# Allegro board M249V10_200212.brd
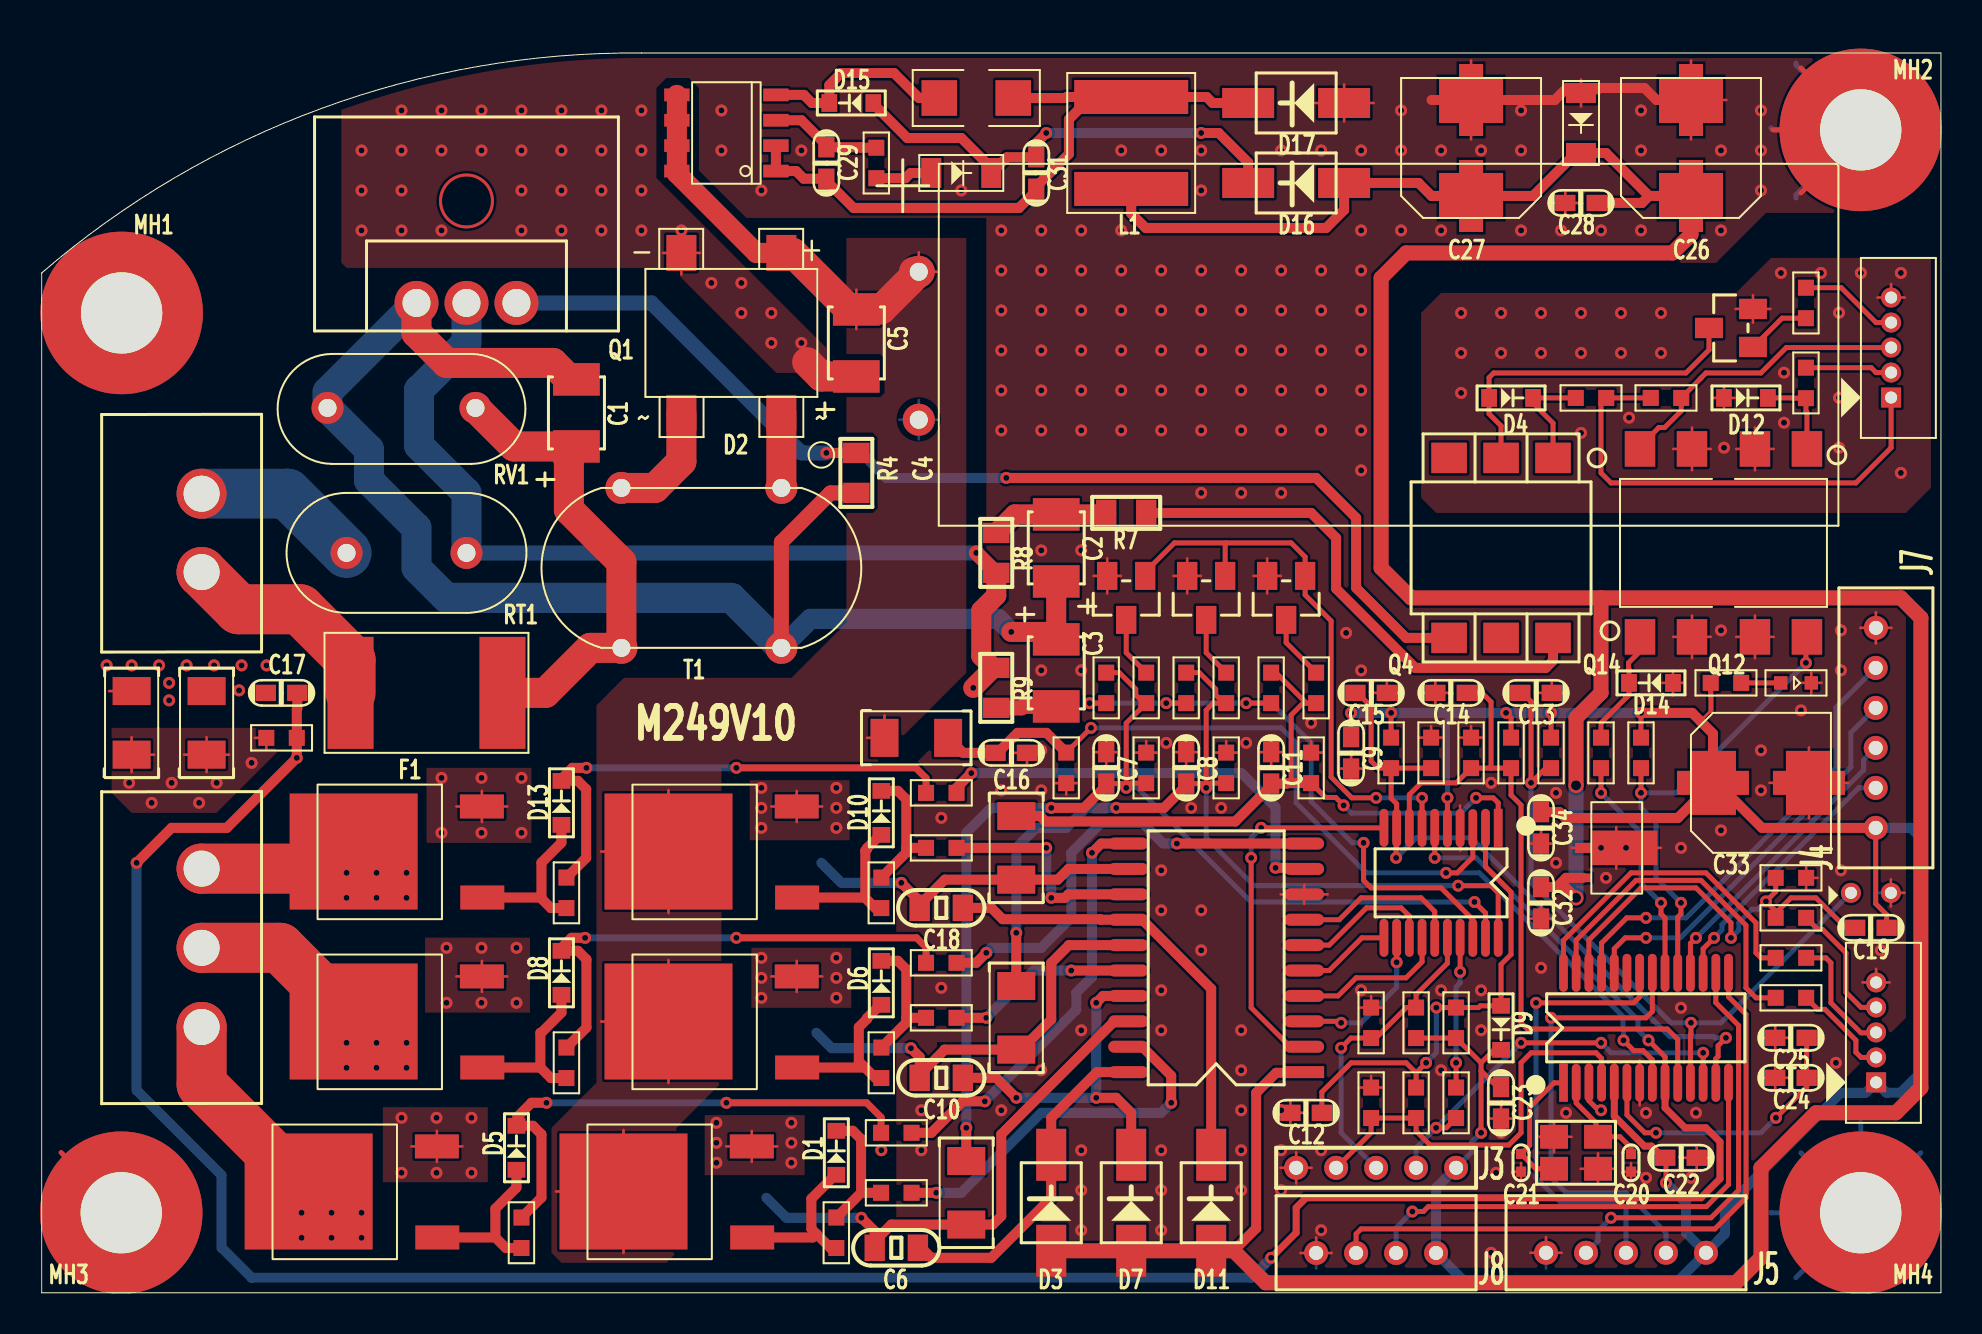
[diagram p0: board, top side]
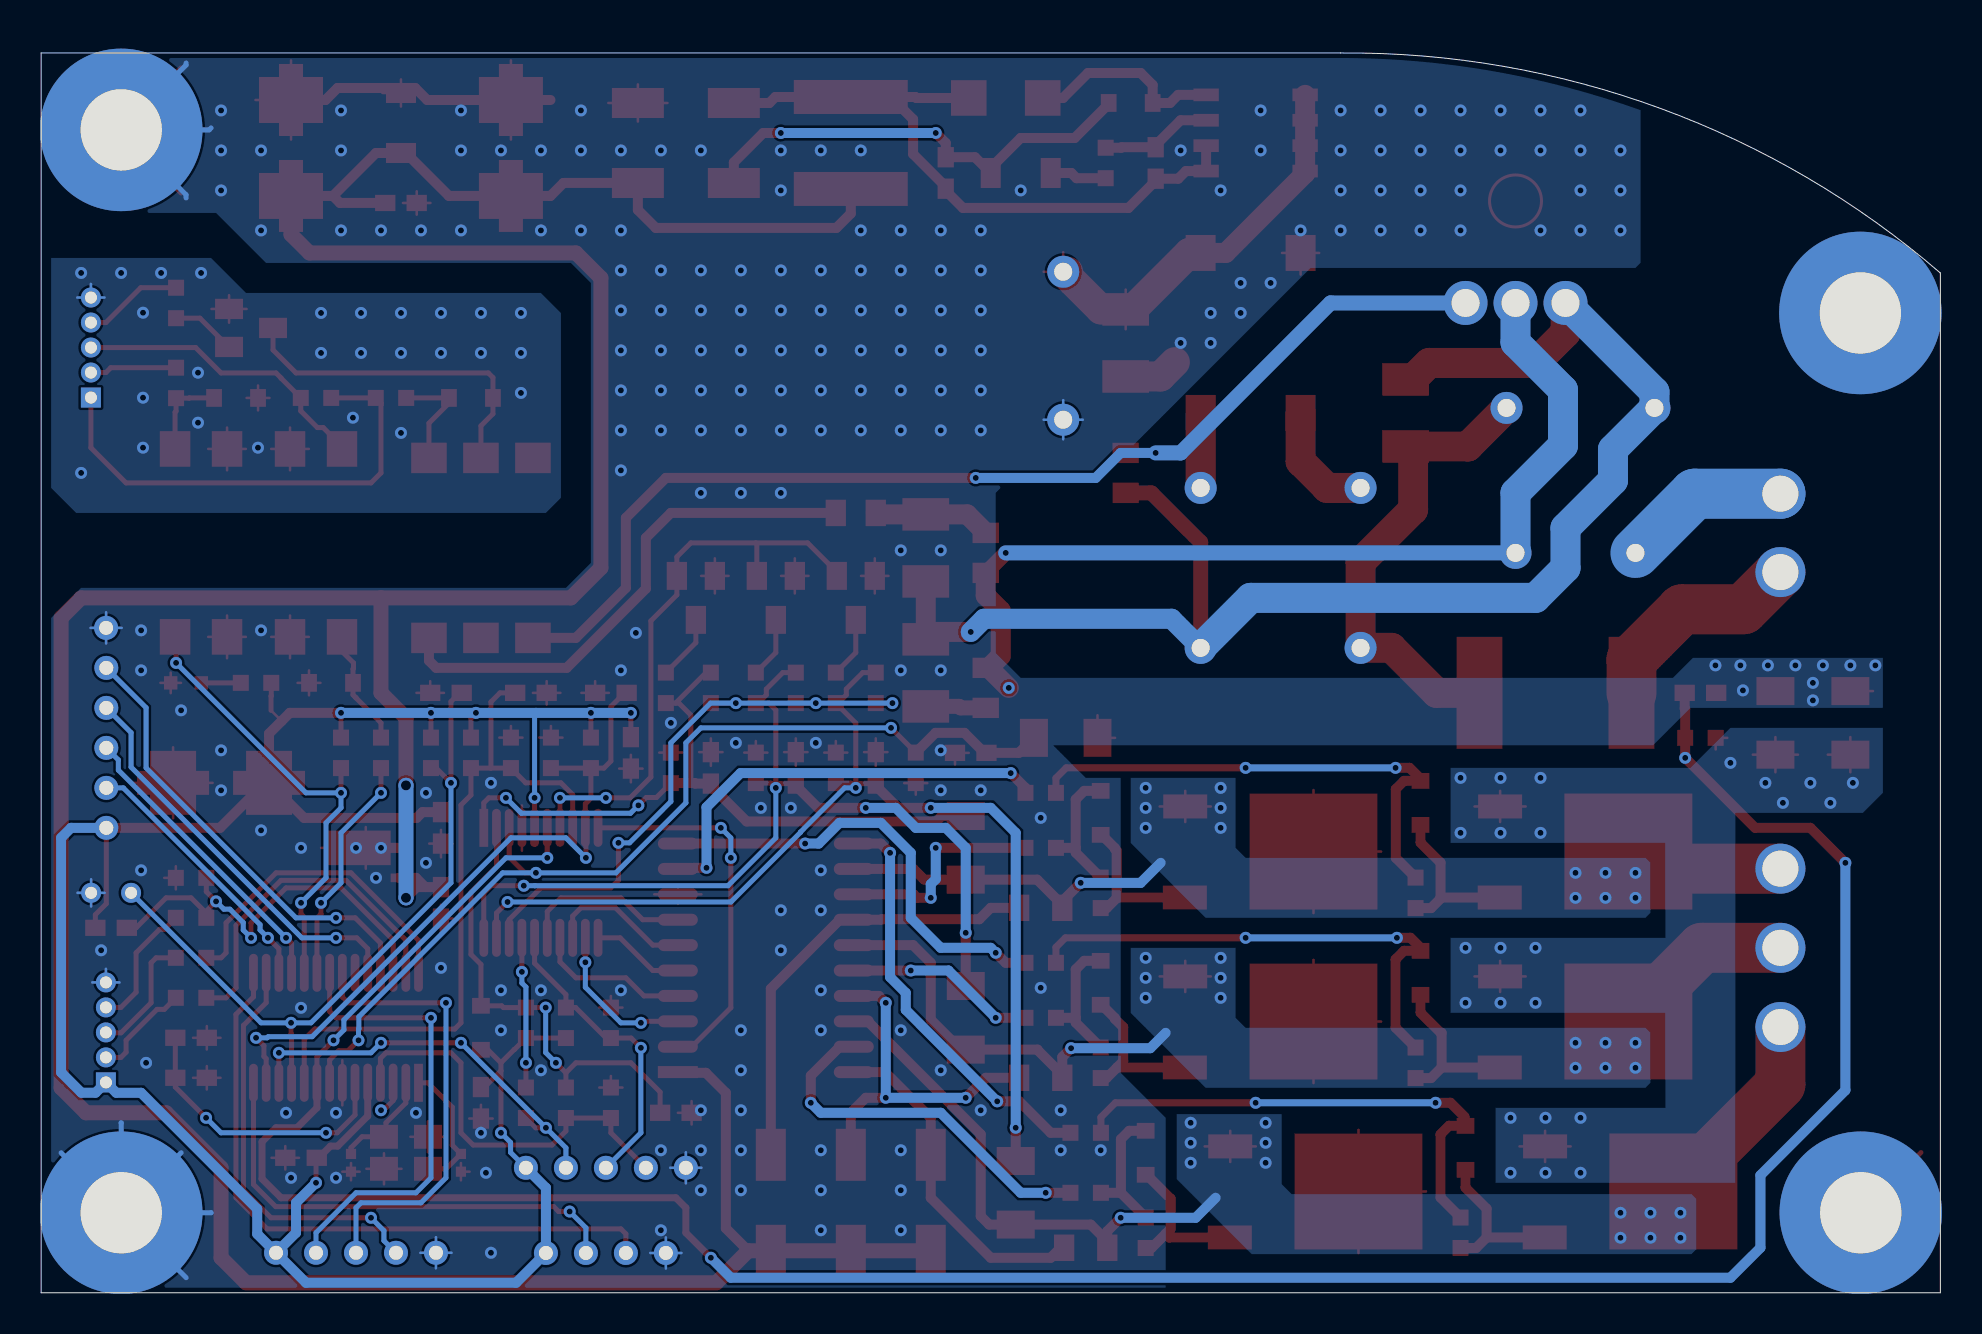
[diagram p1: board, bottom side, seen from below]

Outline 95 x 62 mm; copper layers: TOP, BOTTOM. Coordinates in mm from the lower left corner of the outline.
Outline path: 0,51 arc(14,59.23) 30,62 95,62 95,0 0,0 0,51

## Design rules (mm)
constraint set DEFAULT: min track width 0.127

## Placement (name value [footprint] x y rotation side)
C1  104/500V  [C1210]  26.75 44 90 top
C2  NI-503/400V  [C1210]  50.75 37.25 90 top
C3  103/500V  [C1210]  50.75 31 270 top
C4  100uF/450V  [CAP_18X37]  43.87 47.36 270 top
C5  104/500V  [C1210]  40.75 47.5 90 top
C6  106  [C0805]  42.75 2.25 180 top
C7  474  [C0603]  53.25 26.25 270 top
C8  474  [C0603]  57.25 26.25 270 top
C9  224  [C0603]  65.5 27 90 top
C10  106  [C0805]  45 10.75 180 top
C11  474  [C0603]  61.5 26.25 270 top
C12  105  [C0603]  63.25 9 0 top
C13  474  [C0603]  74.75 30 180 top
C14  474  [C0603]  70.5 30 0 top
C15  224  [C0603]  66.5 30 180 top
C16  474  [C0603]  48.5 27 180 top
C17  474  [C0603]  12 30 0 top
C18  106  [C0805]  45 19.25 180 top
C19  475  [C0603]  91.5 18.25 0 top
C20  NI-10pF  [C0402]  79.5 6.5 90 top
C21  NI-10pF  [C0402]  74 6.5 90 top
C22  106  [C0603]  82 6.75 180 top
C23  104  [C0603]  73 9.5 90 top
C24  475  [C0603]  87.5 10.75 0 top
C25  104  [C0603]  87.5 12.75 0 top
C26  220uF/16V  [C6_3X7_7AV]  82.5 57.25 180 top
C27  220uF/16V  [C6_3X7_7AV]  71.5 57.25 180 top
C28  224  [C0603]  77 54.5 0 top
C29  223  [C0603]  39.25 56.5 90 top
C30  10uF/50V  [C1206]  46.75 59.75 180 top
C31  474  [C0603]  49.75 56 270 top
C32  224  [C0603]  75 19.5 90 top
C33  220uF/16V  [C6_3X7_7AV]  86 25.5 90 top
C34  224  [C0603]  75 23.25 90 top
D1  1N4148WS  [SOD-323]  39.75 7 270 top
D2  -  [DB307S]  34.5 48 180 top
D3  RS1M  [DO-214AC]  50.5 4.5 270 top
D4  1N4148WS  [SOD-323]  73.5 44.75 180 top
D5  1N4148WS  [SOD-323]  23.75 7.25 270 top
D6  1N4148WS  [SOD-323]  42 15.5 270 top
D7  RS1M  [DO-214AC]  54.5 4.5 270 top
D8  1N4148WS  [SOD-323]  26 16 270 top
D9  1N4148WS  [SOD-323]  73 13.25 90 top
D10  1N4148WS  [SOD-323]  42 24 270 top
D11  RS1M  [DO-214AC]  58.5 4.5 270 top
D12  1N4148WS  [SOD-323]  85.25 44.75 180 top
D13  1N4148WS  [SOD-323]  26 24.5 270 top
D14  1N4148WS  [SOD-323]  80.5 30.5 0 top
D15  1N4148WS  [SOD-323]  40.5 59.5 0 top
D16  RS1M  [DO-214AC]  62.75 55.5 0 top
D17  RS1M  [DO-214AC]  62.75 59.5 0 top
F1  JK-SMD075L  [JK-SMD2920]  19.25 30 180 top
J1  WAFER 3.96 2P  [CV-W3961-02]  8 38 90 top
J2  WAFER 3.96 3P  [CV-W3961-03]  8 17.25 90 top
J3  CON5  [PIN-W20-05]  66.75 6.25 180 top
J4  B2S  [PIN-W20-02]  91.5 20 0 top
J5  WAFER 2.0 5P  [CP-W20-05]  79.25 2 0 top
J6  WAFER 1.25 5P  [CCX-W125-05]  92.5 47.25 180 top
J7  WAFER 2.0 6P  [CP-W20-06]  91.75 28.25 270 top
J8  WAFER 2.0 4P  [CP-W20-04]  66.75 2 0 top
J9  WAFER 1.25 5P  [CCX-W125-05]  91.75 13 180 top
L1  1mH  [NR6040]  54.5 57.5 270 top
LED1  RED  [LED0603]  87.75 30.5 0 top
MH1  -  [4MMP8]  4 49 0 top
MH2  -  [4MMP8]  90.99 58.16 0 top
MH3  -  [4MMP8]  3.98 4 0 top
MH4  -  [4MMP8]  90.99 4 0 top
Q1  BTB10-600BW  [TO220HS]  21.25 49.5 0 top
Q2  JY8N5M  [TO252]  35.25 2.75 90 top
Q3  MMBT3904  [SOT-23]  84.5 48.25 90 top
Q4  MOC3042SM  [SOP-6X]  73 37.25 180 top
Q5  JY8N5M  [TO252]  19.5 2.75 90 top
Q6  AO3400  [SOT-23]  54.25 34.75 180 top
Q7  AO3400  [SOT-23]  58.25 34.75 180 top
Q8  JY8N5M  [TO252]  37.5 11.25 90 top
Q9  AO3400  [SOT-23]  62.25 34.75 180 top
Q10  JY8N5M  [TO252]  21.75 11.25 90 top
Q11  JY8N5M  [TO252]  37.5 19.75 90 top
Q12  EL817S1-C  [SOP-4Y]  87 37.5 270 top
Q13  JY8N5M  [TO252]  21.75 19.75 90 top
Q14  EL817S1-C  [SOP-4Y]  81.25 37.5 90 top
R1  5.1R  [R0603]  42.75 5 180 top
R2  100  [R0603]  77.5 44.75 180 top
R3  1K  [R0603]  84.25 30.5 180 top
R4  330  [R0805]  40.75 41 90 top
R5  1K  [R0603]  88.25 49.5 270 top
R6  51R  [R0603]  39.75 3 270 top
R7  360  [R0805]  54.25 39 180 top
R8  0R  [R0805]  47.75 37 270 top
R9  39  [R0805]  47.75 30.25 270 top
R10  5.1R  [R0603]  42.75 8 180 top
R11  560  [R0603]  55.25 30.25 270 top
R12  10K  [R0603]  53.25 30.25 90 top
R13  300K  [R1206]  46.25 5 270 top
R14  51R  [R0603]  24 3 270 top
R15  100K  [R0603]  55.25 26.25 270 top
R16  560  [R0603]  59.25 30.25 270 top
R17  10K  [R0603]  57.25 30.25 90 top
R18  300K  [R1206]  48.75 13.75 270 top
R19  100K  [R0603]  59.25 26.25 270 top
R20  5.1R  [R0603]  45 13.75 180 top
R21  560  [R0603]  63.75 30.25 270 top
R22  51R  [R0603]  42 11.5 270 top
R23  10K  [R0603]  61.5 30.25 90 top
R24  300K  [R1206]  48.75 22.25 270 top
R25  100K  [R0603]  63.5 26.25 270 top
R26  5.1R  [R0603]  45 16.5 180 top
R27  10K  [R0603]  68.75 13.5 270 top
R28  10K  [R0603]  70.75 13.5 270 top
R29  51R  [R0603]  26.25 11.5 270 top
R30  1K  [R0603]  70.75 9.5 270 top
R31  0R  [R0603]  68.75 9.5 270 top
R32  10K  [R0603]  75.5 27 90 top
R33  10K  [R0603]  73.5 27 90 top
R34  10K  [R0603]  67.5 27 90 top
R35  NI-1M  [R1206]  43.75 27.75 180 top
R36  NI-0  [R0603]  66.5 13.5 270 top
R37  NI-1M  [R0603]  66.5 9.5 270 top
R38  10K  [R0603]  12 27.75 180 top
R39  100R  [R0603]  69.5 27 270 top
R40  10K  [R0603]  51.25 26.25 90 top
R41  R005  [R1206]  8.25 28.5 270 top
R42  R005  [R1206]  4.5 28.5 270 top
R43  5.1R  [R0603]  45 22.25 180 top
R44  5.1K  [R0603]  80 27 90 top
R45  51R  [R0603]  42 20 270 top
R46  10K_1%  [R0603]  88.25 45.5 270 top
R47  5.1K  [R0603]  81.25 44.75 180 top
R48  5.1R  [R0603]  45 25 180 top
R49  51R  [R0603]  26.25 20 270 top
R50  NI-47K  [R0603]  87.5 20.75 180 top
R51  10K_1%  [R0603]  78 27 270 top
R52  4.7K  [R0603]  87.5 14.75 0 top
R53  4.7K  [R0603]  87.5 16.75 0 top
R54  4.7K  [R0603]  87.5 18.75 0 top
R55  1K  [R0603]  41.75 56.5 270 top
RT1  MF72-010D11  [MF72D11]  18.25 37 180 top
RT2  10K3950K  [R0603]  71.5 27 90 top
RV1  10D471K  [MOV-10D]  18 44.25 0 top
T1  100uH  [14X9X5_0R8MM]  33 36.25 180 top
U1  JY213H  [SOP20-W300]  58.75 16.75 180 top
U2  JY02A  [SSOP20-W150]  70 20.5 270 top
U3  MPC82FG5B32  [SSOP28-W150]  80.25 13.25 90 top
U4  VIPER12A  [SOIC8]  34.25 58 180 top
U5  78L05  [SOT-89]  78.75 22.25 0 top
Y1  NI-24MHz/10ppm  [XTAL3225]  76.75 7 180 top
ZD1  ZMM18  [SOD-80]  77 58.5 90 top
ZD2  ZMM12  [SOD-80]  46 56 180 top

## Library data of the parts
C1-C3 C5-C19 C22-C25 C28-C32 C34 = CAPACITOR
C4 C26 C27 C33 = CAPACITOR POL
C20 C21 = CAPACITOR_0
D1 D4-D6 D8-D10 D12-D15 = DIODE_SCHTKY_0
D2 = DB107
D3 D7 D11 D16 D17 = LED_0
F1 = FUSE
J1 = CONN PWR 2-H
J2 = HEADER 3
J3 = CONN RECT 5
J4 = B2S_0
J5 J6 J9 = CONN RCPT 5
J7 = CONN RCPT 6
J8 = CONN RCPT 4
L1 = INDUCTOR FERRITE
LED1 = LED
MH1-MH4 = MTH9_0
Q1 = TRIAC_3
Q2 Q5 Q8 Q10 Q11 Q13 = MOS-N_0
Q3 = 2N3904_16
Q4 = TRIAC DRIVER_7
Q6 = MOS-N_6
Q7 = MOS-N_7
Q9 = MOS-N_8
Q12 Q14 = TLP632_0
R1-R55 = R
RT1 RT2 = NTC_2
RV1 = VARISTOR
T1 = CHOKE CM14_0
U1 = NE555_1
U2 = NE555_3
U3 = NE555_8
U4 = RT7266_1: Tolerance: ***; User Part Number: ***
U5 = AMS1117-AOI_1
Y1 = XTAL_4PIN_S
ZD1 ZD2 = ZDIODE_0

## Footprints (pads in the part's own frame, mm; a bottom-side part is the same pattern mirrored in y, then rotated)
4MMP8
  round 8.128 hole 4.064: 1(0,0)
14X9X5_0R8MM
  round 1.6 hole 0.9: 1(-4,4) 2(4,4) 3(4,-4) 4(-4,-4)
C6_3X7_7AV
  custom 3.2x3.6 smd: 1(0,2.4) 2(0,-2.4)
C0402
  rect 0.508x0.508 smd: 1(-0.445,0) 2(0.445,0)
C0603
  rect 1.016x0.813 smd: 1(-0.787,0) 2(0.787,0)
C0805
  rect 1.016x1.321 smd: 1(-1.079,0) 2(1.079,0)
C1206
  rect 1.78x1.78 smd: 1(-1.85,0) 2(1.85,0)
C1210
  rect 1.626x2.337 smd: 1(-1.676,0) 2(1.676,0)
CAP_18X37
  round 1.6 hole 0.9: 1(-3.7,0) 2(3.7,0)
CCX-W125-05
  rect 1x1 hole 0.6: 1(-0.01,2.48)
  round 1 hole 0.6: 2(-0.01,1.23) 3(-0.01,-0.02) 4(-0.01,-1.27) 5(-0.01,-2.52)
CP-W20-04
  round 1.2 hole 0.7: 1(3,-0.01) 2(1,-0.01) 3(-1,-0.01) 4(-3,-0.01)
CP-W20-05
  round 1.2 hole 0.7: 1(4,0) 2(2,0) 3(0,0) 4(-2,0) 5(-4,0)
CP-W20-06
  round 1.2 hole 0.7: 1(5,-0.01) 2(3,-0.01) 3(1,-0.01) 4(-1,-0.01) 5(-3,-0.01) 6(-5,0)
CV-W3961-02
  round 2.5 hole 1.8: 1(-1.96,0) 2(1.96,0)
CV-W3961-03
  round 2.5 hole 1.8: 1(-3.96,0) 2(0,0) 3(3.96,0)
DB307S
  rect 1.5x1.8 smd: 1(-2.5,4) 2(-2.5,-4) 3(2.5,4) 4(2.5,-4)
DO-214AC
  rect 2.6x1.5 smd: 1(2.4,0) 2(-2.4,0)
JK-SMD2920
  rect 2.3x5.6 smd: 1(-3.8,0) 2(3.8,0)
LED0603
  rect 0.671x0.671 smd: 1(-0.762,0) 2(0.768,0)
MF72D11
  round 1.6 hole 0.9: 1(-3,0) 2(3,0)
MOV-10D
  round 1.6 hole 0.9: 1(-3.7,0) 2(3.7,0)
NR6040
  rect 1.7x5.7 smd: 1(-2.3,0) 2(2.3,0)
PIN-W20-02
  round 1 hole 0.6: 1(-1,0) 2(1,0)
PIN-W20-05
  round 1.2 hole 0.7: 1(-4,0) 2(-2,0) 3(0,0) 4(2,0) 5(4,0)
R0603
  rect 0.8x0.8 smd: 1(-0.762,0) 2(0.762,0)
R0805
  rect 1.016x1.321 smd: 1(-1,0) 2(1,0)
R1206
  rect 1.4x1.9 smd: 1(-1.59,0) 2(1.59,0)
SOD-80
  rect 1x1.5 smd: 1(1.5,0) 2(-1.5,0)
SOD-323
  rect 0.787x0.889 smd: 1(1.1,0) 2(-1.1,0)
SOIC8
  rect 1.27x0.635 smd: 1(-2.477,1.905) 2(-2.477,0.635) 3(-2.477,-0.635) 4(-2.477,-1.905) 5(2.477,-1.905) 6(2.477,-0.635) 7(2.477,0.635) 8(2.477,1.905)
SOP20-W300
  rect 2x0.6 smd: 1(-4.4,5.715)
  oval 2x0.6 smd: 2(-4.4,4.445) 3(-4.4,3.175) 4(-4.4,1.905) 5(-4.4,0.635) 6(-4.4,-0.635) 7(-4.4,-1.905) 8(-4.4,-3.175) 9(-4.4,-4.445) 10(-4.4,-5.715) 11(4.4,-5.715) 12(4.4,-4.445) 13(4.4,-3.175) 14(4.4,-1.905) 15(4.4,-0.635) 16(4.4,0.635) 17(4.4,1.905) 18(4.4,3.175) 19(4.4,4.445) 20(4.4,5.715)
SOP-4Y
  rect 1.78x1.525 smd: 1(-4.7,1.3) 2(-4.7,-1.3) 3(4.7,-1.3) 4(4.7,1.3)
SOP-6X
  rect 1.78x1.525 smd: 1(-2.6,-4.5) 2(0,-4.5) 3(2.6,-4.5) 4(2.6,4.5) 5(0,4.5) 6(-2.6,4.5)
SOT-23
  rect 1.016x1.397 smd: 1(-0.95,-1.1) 2(0.95,-1.1) 3(0,1.1)
SOT-89
  rect 0.813x0.432 smd: 1(-1.64,1.497) 3(-1.64,-1.5)
  custom 4.115x1.727 smd: 2(0.011,-0.001)
SSOP20-W150
  rect 1.9x0.44 smd: 1(-2.75,2.857)
  oval 1.9x0.44 smd: 2(-2.75,2.223) 3(-2.74,1.587) 4(-2.74,0.953) 5(-2.74,0.318) 6(-2.75,-0.318) 7(-2.75,-0.953) 8(-2.75,-1.587) 9(-2.75,-2.223) 10(-2.75,-2.857) 11(2.75,-2.857) 12(2.75,-2.223) 13(2.75,-1.587) 14(2.75,-0.953) 15(2.75,-0.318) 16(2.75,0.318) 17(2.75,0.953) 18(2.75,1.587) 19(2.75,2.223) 20(2.75,2.857)
SSOP28-W150
  rect 1.9x0.44 smd: 1(-2.75,4.126)
  oval 1.9x0.44 smd: 2(-2.75,3.491) 3(-2.74,2.856) 4(-2.74,2.221) 5(-2.74,1.586) 6(-2.75,0.951) 7(-2.75,0.316) 8(-2.75,-0.319) 9(-2.75,-0.954) 10(-2.75,-1.589) 11(-2.75,-2.223) 12(-2.75,-2.857) 13(-2.75,-3.493) 14(-2.75,-4.128) 15(2.75,-4.128) 16(2.75,-3.493) 17(2.75,-2.857) 18(2.75,-2.223) 19(2.75,-1.587) 20(2.75,-0.953) 21(2.75,-0.318) 22(2.75,0.318) 23(2.75,0.953) 24(2.75,1.587) 25(2.75,2.223) 26(2.75,2.857) 27(2.75,3.493) 28(2.75,4.128)
TO220HS
  round 2.2 hole 1.4: 1(2.5,0) 2(0,0) 3(-2.5,0)
TO252
  rect 1.2x2.2 smd: 1(0.015,-0.29) 3(4.57,-0.27)
  rect 5.8x6.4 smd: 2(2.315,6.145)
XTAL3225
  rect 1.397x1.194 smd: 1(-1.1,-0.8) 2(1.1,-0.8) 3(1.1,0.8) 4(-1.1,0.8)

## Nets
GND: C4.2 C5.1 C7.1 C8.1 C9.1 C11.1 C12.1 C13.1 C14.1 C15.1 C16.1 C17.1 C20.1 C21.1 C22.1 C23.1 C24.1 C25.1 C26.2 C27.2 C28.1 C32.1 C33.2 C34.1 D2.4 D14.1 D17.1 J3.5 J4.2 J5.5 J7.6 J8.4 J9.5 LED1.2(CATHODE) MH1.1(NC) MH2.1(NC) MH3.1(NC) MH4.1(NC) Q6.2(SOURCE) Q7.2(SOURCE) Q9.2(SOURCE) Q12.3(EMITTER) Q14.2 R15.1 R19.1 R25.1 R36.1 R37.1 R39.1 R40.1 R41.1 R42.1 R50.1 RT2.2 U1.8 U2.4 U3.7 U5.2(VSS) Y1.2 Y1.4 ZD1.1
GND_SIGNAL: D12.1 J6.5 Q3.2(EMITTER) Q12.2 Q14.3(EMITTER)
VCC-IO: J6.1 R2.1 R47.2
AT: C14.2 R33.1 RT2.1 U2.8 U3.10
CT: C13.2 J4.1 R32.1 U3.11
DC5V: C9.2 C19.2 C22.2 C23.2 C33.1 C34.2 D9.2(C) J3.1 J5.1 J7.1 J8.1 J9.1 R3.2 R27.2 R28.2 R32.2 R33.2 R34.2 R44.2 U2.5 U3.5(VSS) U5.1
DC12V: C26.1 C27.1 C28.2 C32.2 D3.1 D7.1 D11.1 D16.1 L1.2 U1.1 U5.3 ZD1.2(CATHODE)
DC310V: C4.1 C5.2 D2.2(DC OUT PLUS) Q2.2 Q8.2 Q11.2 R35.2 U4.5 U4.6 U4.7 U4.8
DS-PWM: U3.3
DS-RXD: J5.3 U3.22
DS-SLP: J5.4 U3.16
DS-TXD: J5.2 U3.21
EMF: R12.1 R17.1 R23.1 U2.18
EMF-ON: Q6.1 Q7.1 Q9.1 U2.7
EMFA: C7.2 R11.2 R12.2 R13.1 R15.2 U2.19
EMFB: C8.2 R16.2 R17.2 R18.1 R19.2 U2.20
EMFC: C11.2 R21.2 R23.2 R24.1 R25.2 U2.1
IOUT: Q5.3(SOURCE) Q10.3(SOURCE) Q13.3(SOURCE) R38.2 R41.2 R42.2
IS: C17.2 R38.1 U2.6 U3.9
MO: R30.1 U2.17
MP: J3.2 R30.2 U3.12
MPC-RX: Q12.4 R44.1 U3.19
MPC-TX: R51.2 U3.20
OCDSCL: R52.1 U3.27
OCDSDA: R53.1 U3.28
OSW1: J7.2 U3.17
OSW2: J7.3 U3.18
P3_5: U3.23
PIR1: J7.4 U3.24
PIR2: J7.5 U3.25
PRS1: J8.2 U3.14
PRS2: J8.3 U3.15
PWR-ON: J6.4 R5.1
QD: C15.2 R34.1 R39.2 U2.9 U3.13
RST: C19.1 R50.2 R54.1 U3.26
SYS-RX: J6.3 Q14.4 R47.1
SYS-TX: J6.2 R46.1
U: C6.2 J2.1 Q2.3(SOURCE) Q5.2 R13.2 U1.18
UH: U1.2 U2.10
UHO: R1.1 U1.19
UL: U1.5 U2.11
ULO: R10.1 U1.11
UVB: C6.1 D3.2(CATHODE) U1.20
V+: C10.2 J2.2 Q8.3(SOURCE) Q10.2 R18.2 U1.15
VH: U1.3 U2.12
VHO: R20.1 U1.16
VL: U1.6 U2.13
VLO: R26.1 U1.10
VOD: C16.2 R35.1 R40.2 U2.3 U3.8
VR: C12.2 D9.1 R28.1 R31.1 U2.2
VRI: J3.4 R31.2 R37.2 U3.4
VVB: C10.1 D7.2(CATHODE) U1.17
W: C18.2 J2.3 Q11.3(SOURCE) Q13.2 R24.2 U1.12(VSW)
WH: U1.4 U2.14
WHO: R43.1 U1.13
WL: U1.7 U2.15
WLO: R48.1 U1.9
WVB: C18.1 D11.2(CATHODE) U1.14
XTAL1: C21.2 U3.1 Y1.3
XTAL2: C20.2 U3.2 Y1.1
ZF: J3.3 R27.1 R36.2 U2.16(Z/F)
N4601745: C1.2 C2.1 C3.1 Q1.3 R4.1 RV1.1 T1.1
N4601755: C1.1 F1.1 RV1.2 T1.2
N4602027: D2.3 T1.3
N16738380: D1.2(C) R1.2 R6.1
N16738503: D5.2(C) R10.2 R14.1
N16738511: D5.1 Q5.1 R14.2
N16741777: D1.1 Q2.1 R6.2
N16742623: D6.2(C) R20.2 R22.1
N16742635: D6.1 Q8.1 R22.2
N16742849: D8.2(C) R26.2 R29.1
N16742861: D8.1 Q10.1 R29.2
N16743057: D10.2(C) R43.2 R45.1
N16743069: D10.1 Q11.1 R45.2
N16743283: D13.2(C) R48.2 R49.1
N16743295: D13.1 Q13.1 R49.2
N16774211: Q7.3 R16.1
N16774244: Q6.3 R11.1
N16774481: Q9.3 R21.1
N16819977: D2.1 T1.4
N16878550: C24.2 C25.2 U3.6
N16891021: J9.2 R52.2
N16891035: J9.3 R53.2
N16891049: J9.4 R54.2
N16892886: D14.2(C) Q14.1 R51.1
N16893309: D12.2(C) Q12.1 R46.2
N16971591: LED1.1 R3.1
N16977302: J1.2 RT1.2
N16977308: F1.2 J1.1
N16980594: D4.2(C) Q4.1 R2.2
N16984452: Q4.6 R7.1
N16984463: Q1.2 R8.2 R9.1 RT1.1
N16984545: D4.1 Q3.3 Q4.2
N16986923: Q1.1(GATE) Q4.4 R4.2
N16989663: Q3.1 R5.2
N16989795: C3.2 R9.2
N16991969: C2.2 R7.2 R8.1
N16997004: C30.2 D15.2(C) U4.4(VDD)
N16997008: C31.1 D15.1 D16.2(CATHODE) ZD2.2(CATHODE)
N16997012: C29.1 C30.1 C31.2 D17.2(CATHODE) L1.1 U4.1 U4.2
N16997119: R55.2 ZD2.1
N16997188: C29.2 R55.1 U4.3

Pads without a net: Q4 3 5

## Via types
v1: diameter 0.6, hole 0.3, TOP to BOTTOM, 395 vias
v2: diameter 0.75, hole 0.5, TOP to BOTTOM, 2 vias

## Routing (per net, layer and track width the routed paths; a pad name or vN(x,y) marks a point on that pad's centre or on a via; arc(x,y) is an arc through that point)
GND: length 235.8
  TOP w0.127: R36.1 66.5,14.84 ; R36.1 67.08,14.26 ; R36.1 65.92,14.26 ; 74.42,22.46 C34.1 ; C34.1 75,23.15 ; C34.1 75,21.78 ; C34.1 75.58,22.46 ; J8.4 64.53,1.99 ; J8.4 62.97,1.99 ; J8.4 63.75,2.77 ; C32.1 75,19.4 ; C32.1 75,18.03 ; C32.1 75.58,18.71 ; C32.1 74.42,18.71 ; J5.5 75.25,2.78 ; J5.5 74.47,2 ; J5.5 76.03,2 ; C26.2 82.5,61.63 ; C26.2 84.28,59.65 ; C26.2 82.5,57.67 ; 77,59.32 ZD1.1 ; ZD1.1 77.93,60 ; ZD1.1 76.07,60 ; ZD1.1 77,60.68 ; 53.25,26.35 C7.1 ; C7.1 53.83,27.04 ; C7.1 53.25,27.72 ; C7.1 52.67,27.04 ; 32,50.92 D2.4 ; D2.4 32.93,52 ; D2.4 31.07,52 ; D2.4 32,53.08 ; 63.15,19.45 U1.8 ; U1.8 64.33,19.93 ; U1.8 63.15,20.4 ; U1.8 61.97,19.93 ; 53.3,34.97 Q6.2 ; Q6.2 53.3,36.73 ; Q6.2 53.99,35.85 ; Q6.2 52.61,35.85 ; 51.25,24.91 R40.1 ; R40.1 51.83,25.49 ; R40.1 50.67,25.49 ; C23.1 73,9.4 ; C23.1 73,8.03 ; C23.1 72.42,8.71 ; C23.1 73.58,8.71 ; 91.75,32.47 J7.6 ; J7.6 90.97,33.25 ; J7.6 92.53,33.25 ; J7.6 91.75,34.03 ; 62.46,8.42 C12.1 ; C12.1 63.15,9 ; C12.1 62.46,9.58 ; 74.77,7.8 Y1.2 ; Y1.2 75.65,8.57 ; Y1.2 76.53,7.8 ; Y1.2 75.65,7.03 ; R50.1 88.84,20.75 ; R50.1 88.26,20.17 ; R50.1 88.26,21.33 ; J3.5 62.75,7.03 ; J3.5 62.75,5.47 ; J3.5 63.53,6.25 ; J3.5 61.97,6.25 ; C8.1 57.83,27.04 ; C8.1 56.67,27.04 ; C8.1 57.25,27.72 ; C8.1 57.25,26.35 ; Q7.2 57.99,35.85 ; Q7.2 56.61,35.85 ; Q7.2 57.3,36.73 ; Q7.2 57.3,34.97 ; C13.1 76.22,30 ; C13.1 75.54,30.58 ; C13.1 74.85,30 ; J4.2 93.18,20 ; J4.2 92.5,20.68 ; J4.2 92.5,19.32 ; 84.76,32.8 Q12.3 ; Q12.3 85.7,33.87 ; Q12.3 86.64,32.8 ; Q12.3 85.7,31.73 ; C22.1 83.47,6.75 ; C22.1 82.79,7.33 ; C22.1 82.79,6.17 ; C22.1 82.1,6.75 ; C28.1 76.9,54.5 ; C28.1 76.21,55.08 ; C28.1 75.53,54.5 ; C28.1 76.21,53.92 ; LED1.2 88.52,31.01 ; LED1.2 88,30.5 ; LED1.2 88.52,29.99 ; LED1.2 89.03,30.5 ; 63.67,59.5 D17.1 ; D17.1 65.15,58.57 ; D17.1 65.15,60.43 ; D17.1 66.63,59.5 ; 62.92,27.01 R25.1 ; R25.1 64.08,27.01 ; R25.1 63.5,27.59 ; RT2.2 72.08,27.76 ; RT2.2 71.5,28.34 ; RT2.2 70.92,27.76 ; 60.92,27.04 C11.1 ; C11.1 62.08,27.04 ; C11.1 61.5,26.35 ; C11.1 61.5,27.72 ; R37.1 66.5,10.84 ; R37.1 65.92,10.26 ; R37.1 67.08,10.26 ; 74,5.62 C21.1 ; C21.1 73.57,6.06 ; C21.1 74,6.49 ; 58.67,27.01 R19.1 ; R19.1 59.83,27.01 ; R19.1 59.25,27.59 ; 61.3,34.97 Q9.2 ; Q9.2 61.99,35.85 ; Q9.2 60.61,35.85 ; Q9.2 61.3,36.73 ; 86.03,12.75 C25.1 ; C25.1 86.71,12.17 ; C25.1 87.4,12.75 ; C25.1 86.71,13.33 ; 49.29,26.42 C16.1 ; C16.1 49.97,27 ; C16.1 48.6,27 ; C14.1 70.4,30 ; C14.1 69.03,30 ; C14.1 69.71,29.42 ; C14.1 69.71,30.58 ; 86.03,10.75 C24.1 ; C24.1 86.71,11.33 ; C24.1 86.71,10.17 ; C24.1 87.4,10.75 ; 79.07,6.06 C20.1 ; C20.1 79.93,6.06 ; C20.1 79.5,6.49 ; C20.1 79.5,5.62 ; 81.6,29.88 D14.1 ; D14.1 81.03,30.5 ; D14.1 82.17,30.5 ; D14.1 81.6,31.12 ; 79.93,9.37 U3.7 79.93,11.63 ; R39.1 70.08,27.76 ; R39.1 68.92,27.76 ; R39.1 69.5,28.34 ; Y1.4 77.85,6.97 ; Y1.4 76.97,6.2 ; Y1.4 77.85,5.43 ; Y1.4 78.73,6.2 ; C15.1 67.29,30.58 ; C15.1 67.97,30 ; C15.1 66.6,30 ; C9.1 65.5,26.9 ; C9.1 66.08,26.21 ; C9.1 64.92,26.21 ; C9.1 65.5,25.53 ; R42.1 3.37,30.09 ; Q14.2 82.55,33.87 ; Q14.2 81.61,32.8 ; Q14.2 83.49,32.8 ; Q14.2 82.55,31.73 ; 71.5,61.63 C27.2 71.5,57.67 ; C33.2 90.38,25.5 ; C33.2 88.4,27.28 ; C33.2 86.42,25.5 ; C33.2 88.4,23.72 ; 76.53,22.25 U5.2 ; U5.2 78.76,23.29 ; U5.2 78.76,21.21 ; U5.2 81,22.25 ; 70.95,24.37 U2.4 70.95,22.11 ; R15.1 55.83,27.01 ; R15.1 54.67,27.01 ; R15.1 55.25,27.59 ; J9.5 91.76,16.2 ; J9.5 92.44,15.52 ; J9.5 91.08,15.52
  TOP w0.25: 88,61.25 90.99,58.26 MH2.1 ; MH2.1 86.59,58.16 ; MH2.1 90.99,57.99 88,55 ; MH3.1 0.97,7.01
  TOP w0.5: C26.2 80.77,59.65 80.17,60.25 76.29,60.25 75.69,59.65 C27.2 69.52,59.65
  TOP w1.5: C5.1 39.01,45.82 38.29,46.54
  BOTTOM w0.127: 75.25,1.22 J5.5 ; J5.5 74.47,2 ; J5.5 76.03,2 ; J5.5 75.25,2.78 ; C4.2 44.85,43.66 ; C4.2 43.87,42.68 ; C4.2 42.9,43.66 ; C4.2 43.87,44.64 ; J9.5 92.44,15.52 ; J9.5 91.76,16.2 ; J9.5 91.08,15.52 ; 90.97,33.25 J7.6 ; J7.6 92.53,33.25 ; J7.6 91.75,32.47 ; J7.6 91.75,34.03 ; 62.75,5.47 J3.5 ; J3.5 62.75,7.03 ; J3.5 61.97,6.25 ; J3.5 63.53,6.25 ; 62.97,1.99 J8.4 ; J8.4 63.75,2.77 ; J8.4 63.75,1.21 ; J8.4 64.53,1.99 ; J4.2 93.18,20 ; J4.2 92.5,19.32 ; J4.2 92.5,20.68 ; J4.2 91.82,20
  BOTTOM w0.25: 94,7 91,4 MH4.1 ; MH2.1 86.59,58.16 86.5,58.25 ; MH2.1 87.75,61.4 87.75,61.5 ; MH2.1 87.75,54.91 87.75,54.75 ; 90.99,4.01 88,7 ; 90.99,4.01 90.99,8.49 91,8.5 ; 90.99,4.01 MH4.1 ; MH4.1 87.75,0.75 ; MH4.1 86.5,4 86.5,4
  vias: v1(3.25,31.38) v1(4.5,31.38) v1(5.88,31.38) v1(6.38,30.5) v1(6.38,29.62) v1(7.25,31.38) v1(8.62,31.38) v1(9.88,30.12) v1(10,31.38) v1(11.25,31.38) v1(16,57.13) v1(16,55.13) v1(16,53.13) v1(18,59.13) v1(18,57.13) v1(18,55.13) v1(18,53.13) v1(20,59.13) v1(20,57.13) v1(20,53.13) v1(22,59.13) v1(22,57.13) v1(24,59.13) v1(24,57.13) v1(24,55.13) v1(24,53.13) v1(26,59.13) v1(26,57.13) v1(26,55.13) v1(26,53.13) v1(28,59.13) v1(28,57.13) v1(28,55.13) v1(28,53.13) v1(30,59.13) v1(30,57.13) v1(30,55.13) v1(30,53.13) v1(32,53.13) v1(33.5,50.5) v1(34,59.13) v1(34,57.13) v1(35,50.5) v1(35,49) v1(36,55.13) v1(36.5,49) v1(36.5,47.5) v1(38,57.13) v1(38,47.5) v1(42,7.13) v1(44,9.13) v1(44,7.13) v1(45,23.75) v1(45,15.25) v1(46,55.13) v1(48,53.13) v1(48,51.13) v1(48,49.13) v1(48,47.13) v1(48,45.13) v1(48,43.13) v1(48,25.13) v1(48,9.13) v1(50,53.13) v1(50,51.13) v1(50,49.13) v1(50,47.13) v1(50,45.13) v1(50,43.13) v1(50,37.13) v1(50,31.13) v1(50,27.13) v1(50,25.13) v1(50,11.13) v1(52,53.13) v1(52,51.13) v1(52,49.13) v1(52,47.13) v1(52,45.13) v1(52,43.13) v1(52,37.13) v1(52,31.13) v1(52,13.13) v1(52,7.13) v1(52,5.13) v1(52,3.13) v1(54,57.13) v1(54,53.13) v1(54,51.13) v1(54,49.13) v1(54,47.13) v1(54,45.13) v1(54,43.13) v1(56,57.13) v1(56,51.13) v1(56,49.13) v1(56,47.13) v1(56,45.13) v1(56,43.13) v1(56,21.13) v1(56,19.13) v1(56,15.13) v1(56,13.13) v1(56,7.13) v1(56,5.13) v1(56,3.13) v1(56.25,27.5) v1(57.5,24.25) v1(58,57.13) v1(58,55.13) v1(58,51.13) v1(58,49.13) v1(58,47.13) v1(58,45.13) v1(58,43.13) v1(58,40) v1(58,19.13) v1(58,17.13) v1(59,24.25) v1(60,51.13) v1(60,49.13) v1(60,47.13) v1(60,45.13) v1(60,43.13) v1(60,40) v1(60,13.13) v1(60,11.13) v1(60,9.13) v1(60,7.13) v1(60,5.13) v1(60.25,27.5) v1(62,57.13) v1(62,51.13) v1(62,49.13) v1(62,47.13) v1(62,45.13) v1(62,43.13) v1(62,40) v1(62,9.13) v1(62,7.13) v1(62,5.13) v1(63.5,28.5) v1(64,57.13) v1(64,51.13) v1(64,49.13) v1(64,47.13) v1(64,45.13) v1(64,43.13) v1(64,7.13) v1(64,3.13) v1(65.25,33) v1(66,57.13) v1(66,53.13) v1(66,51.13) v1(66,49.13) v1(66,47.13) v1(66,45.13) v1(66,43.13) v1(66,41.13) v1(66,31.13) v1(66,15.13) v1(68,59.13) v1(68,57.13) v1(68,53.13) v1(70,57.13) v1(70,53.13) v1(70,15.13) v1(70,11.13) v1(72,57.13) v1(72,15.13) v1(72,13.13) v1(72.5,25.5) v1(72.5,2) v1(72.75,6) v1(73,8) v1(74,59.13) v1(74,57.13) v1(74,53.13) v1(75,16.25) v1(75.75,25) v1(75.75,21.5) v1(76,53.13) v1(76.25,9) v1(78,53.13) v1(78,22.25) v1(78.25,20.75) v1(79.25,22.25) v1(80,59.13) v1(80,57.13) v1(80,53.13) v1(80.25,9) v1(80.25,5.75) v1(82,22.25) v1(82,14.25) v1(82.5,5.75) v1(82.75,9) v1(84,57.13) v1(84,53.13) v1(84,33.13) v1(84,23.13) v1(86,59.13) v1(86,57.13) v1(86,55.13) v1(86,27.13) v1(86,25.13) v1(88,29.13) v1(89.75,11.5) v1(90,33.13) v1(90,31.13) v1(90,21.13) v1(92,17.13)
GND_SIGNAL: length 17.6
  TOP w0.127: 81.61,42.2 Q14.3 ; Q14.3 82.55,43.27 ; Q14.3 82.55,41.13 ; Q14.3 83.49,42.2 ; 83.58,44.75 D12.1 ; D12.1 84.15,44.13 ; D12.1 84.15,45.37 ; D12.1 84.72,44.75 ; J6.5 93.19,49.77 ; J6.5 92.51,50.45 ; J6.5 91.83,49.77 ; 85.6,48.51 Q3.2 ; Q3.2 85.6,49.89 ; Q3.2 86.48,49.2 ; Q3.2 84.72,49.2 ; 85.7,41.13 Q12.2 ; Q12.2 86.64,42.2 ; Q12.2 84.76,42.2 ; Q12.2 85.7,43.27
  BOTTOM w0.127: 91.83,49.77 J6.5 ; J6.5 93.19,49.77 ; J6.5 92.51,50.45
  vias: v1(71,49) v1(71,47) v1(71,45) v1(73,49) v1(73,47) v1(75,49) v1(75,47) v1(77,49) v1(77,47) v1(77,43) v1(79,49) v1(79,47) v1(79.4,43.76) v1(81,49) v1(81,47) v1(84.15,42.26) v1(87,51) v1(87.15,46.01) v1(87.15,43.51) v1(89,51) v1(89.9,49.01) v1(89.9,44.76) v1(89.9,42.26) v1(91,51) v1(93,51) v1(93,41)
VCC-IO: length 24
  TOP w0.25: R47.2 R2.1 78,44.49 78,41 78.5,40.5 90.75,40.5 92.51,42.26 J6.1
AT: length 35.3
  TOP w0.25: C14.2 72.05,30 72.5,29.55 72.5,26.24 ; 72.5,26.24 R33.1 73.5,24.89 74,24.39 74,13.5 74.31,13.19 81.31,13.19 81.84,12.66 U3.10 ; 72.5,26.24 RT2.1 70.76,25.5 69,25.5 68.41,24.91 U2.8
CT: length 35.7
  TOP w0.25: v1(82.5,13.5) 82.5,12.94 82.47,12.92 U3.11 ; C13.2 74.06,30 74.5,29.56 v1(74.5,25.5) 75.24,26.24 R32.1
  BOTTOM w0.25: v1(74.5,25.5) 74.5,20.5 81.5,13.5 v1(82.5,13.5) 84,13.5 J4.1
DC5V: length 131
  TOP w0.127: 83.5,29.12 82.97,28.59
  TOP w0.25: v1(81.25,5.5) 81.25,6.71 ; 72,11.1 v1(72,8) ; 72,11.1 72.81,10.29 C23.2 ; 72,11.1 72,11.5 ; R3.2 83.49,29.85 83.5,29.84 83.5,29.12 ; R33.2 73.5,28.75 v1(73.25,29) ; v1(70.32,24.75) U2.5 ; R44.2 v1(80,29) ; C19.2 92.29,18.91 91.74,19.46 J7.1 ; R34.2 v1(67.5,29) ; R32.2 v1(75.5,29) ; v1(65.5,29) C9.2 ; D9.2 72.65,12.15 72,11.5 ; 72,11.5 71.34,12.16 71.33,12.16 R28.2 R27.2
  TOP w0.35: C22.2 81.11,6.75 80.53,7.33 80.17,7.33 78.66,8.84 U3.5
  TOP w0.5: C33.1 83.8,25.5 86.05,23.25 J7.1 ; C33.1 83.6,27.96 82.56,29 v1(80,29) ; C33.1 81.85,23.75 U5.1 76.22,23.75 75.93,24.04 C34.2 ; 81.25,6.71 C22.2
  BOTTOM w0.25: 70.25,29 70.32,28.93 v1(70.32,24.75) ; J3.1 71.52,7.02 71.52,7.52 v1(72,8)
  BOTTOM w0.5: v1(80,29) v1(75.5,29) v1(73.25,29) v1(67.5,29) v1(65.5,29) ; v1(81.25,5.5) 82.25,4.5 82.25,3 J5.1 ; J3.1 69.75,5.25 J8.1 71.24,0.5 81.75,0.5 J5.1 ; J7.1 93.5,23.25 94,22.75 94,11.02 92.98,10 92.28,10 J9.1 91.24,10 90,10 84.19,4.19 84.19,2.94 J5.1
DC12V: length 201.5
  TOP w0.5: L1.2 54.5,53.97 55.22,53.25 64.25,53.25 65.15,54.15 D16.1 68.87,55.5 69.52,54.85 C27.1 74.6,54.85 76.75,57 ZD1.2 78.25,57 80.4,54.85 ; U1.1 63.12,11 61.75,11 60.75,10 60.75,3.22 59.63,2.1 ; v2(76.75,19.75) 76.21,20.29 75.79,20.29 ; C32.2 75.79,20.29 ; 75.79,20.29 76.25,20.75 U5.3 ; C28.2 80.05,54.5 80.4,54.85 ; 80.4,54.85 C26.1
  TOP w0.75: D3.1 D7.1 D11.1 59.63,2.1 61.23,0.5 84.75,0.5 86,1.75 86,6.25 88.75,9 92.75,9 94,10.25 94,33.75 93,34.75 78,34.75 ; C26.1 82.5,52.92 81.58,52 68.25,52 67,50.75 67,36.25 68.5,34.75 78,34.75 ; 78,34.75 78,30 76.75,28.75 v2(76.75,25.38)
  BOTTOM w0.75: v2(76.75,25.38) v2(76.75,19.75)
DC310V: length 55.4
  TOP w0.127: 31.36,10.49 Q8.2 ; Q8.2 27.98,13.56 ; Q8.2 31.36,16.64 ; 29.11,1.99 Q2.2 ; Q2.2 29.11,8.14 ; Q2.2 25.73,5.07 ; Q11.2 31.36,25.14 ; Q11.2 31.36,18.99 ; Q11.2 27.98,22.07 ; 41.28,27.75 R35.2 42.16,28.88 ; 40.75,50.17 C5.2 40.75,48.19 ; C4.1 44.85,51.06 ; C4.1 43.87,52.04 ; C4.1 43.87,50.08
  TOP w1: D2.2 35.75,52 31.77,55.98 U4.8 U4.7 U4.6 U4.5
  TOP w1.5: 43.63,51.06 C4.1 41.99,49.18 C5.2 40.39,49.18 37.57,52 D2.2
DS-PWM: length 1.7
  TOP w0.25: U3.3 77.39,9.61 77.75,9.25 77.88,9.25 v1(78,9.13)
DS-RXD: length 22.6
  TOP w0.25: v1(74.75,14.5) 79.63,14.5 79.93,14.8 U3.22
  BOTTOM w0.25: J5.3 79.25,4.25 79,4.5 76,4.5 74.75,5.75 v1(74.75,14.5)
DS-SLP: length 20.6
  TOP w0.25: U3.16 83.74,14.51 84.88,13.37 84.88,5.13 83.5,3.75 v1(78.5,3.75)
  BOTTOM w0.25: v1(78.5,3.75) 77.85,3.1 77.85,2.6 J5.4
DS-TXD: length 23
  TOP w0.25: v1(75.5,13.75) 80.25,13.75 80.57,14.07 U3.21
  BOTTOM w0.25: v1(75.5,13.75) 75.5,5.75 76.25,5 79.25,5 81.25,3 J5.2
EMF: length 30.5
  TOP w0.25: R17.1 v1(56.25,29.49) ; R23.1 v1(60.25,29.49) ; U2.18 71.59,18.66 70,20.25 66.5,20.25 66.38,20.37 66.37,20.37 66.12,20.62 v1(66.12,22.5) ; R12.1 v1(52.42,29.49)
  BOTTOM w0.25: v1(66.12,22.5) 65.57,22.5 63.5,24.57 63.5,27.5 61.51,29.49 v1(60.25,29.49) v1(56.25,29.49) v1(52.42,29.49)
EMF-ON: length 28.8
  TOP w0.25: 59.25,37.5 56.66,37.5 55.2,36.04 Q6.1 ; 59.25,37.5 62.5,37.5 63.2,36.8 Q9.1 63.2,34.9 64.5,33.6 64.5,25.79 65.54,24.75 v1(66.75,24.75) ; 59.25,37.5 59.2,37.45 Q7.1 ; U2.7 v1(69.05,24.75)
  BOTTOM w0.25: v1(66.75,24.75) v1(69.05,24.75)
EMFA: length 55.9
  TOP w0.25: v1(71.67,19.54) 72.22,18.99 U2.19 ; R12.2 53.9,31.01 54.73,30.19 54.73,29.9 55.14,29.49 R11.2 54.25,28.49 v1(54.25,25.25) ; v1(54.25,25.25) 54.49,25.49 R15.2 ; v1(54.25,25.25) 54.04,25.46 C7.2
  TOP w0.5: v1(50.5,24.25) 52.14,24.25 53.25,25.36 C7.2 ; R13.1 v1(46.25,8.25)
  BOTTOM w0.25: v1(71.67,19.54) 60.49,19.54 57.02,23.02 57.02,23.04 54.81,25.25 v1(54.25,25.25)
  BOTTOM w0.5: v1(50.5,24.25) 47.5,24.25 46.25,23 v1(46.25,8.25)
EMFB: length 47.2
  TOP w0.25: 59.14,29.49 58.73,29.9 58.73,30.19 57.9,31.01 R17.2 ; 59.14,29.49 R16.2 ; 59.14,29.49 58.6,29.49 58.25,29.14 v1(58.25,25.25) ; C8.2 58.04,25.46 v1(58.25,25.25) ; v1(58.25,25.25) 58.49,25.49 R19.2 ; U2.20 72.86,20 72.5,20.36 v1(70.86,20.36)
  TOP w0.5: v1(53.75,24.25) 56.14,24.25 57.25,25.36 C8.2 ; R18.1 v1(48.75,18)
  BOTTOM w0.25: v1(70.86,20.36) 70.3,20.36 60.64,20.36 58.25,22.75 v1(58.25,25.25)
  BOTTOM w0.5: v1(53.75,24.25) 52.25,24.25 51.25,23.25 49.75,23.25 48.75,22.25 v1(48.75,18)
EMFC: length 34.7
  TOP w0.25: 62.5,25.49 62.5,28.89 63.1,29.49 63.26,29.49 ; 63.26,29.49 R21.2 ; 63.26,29.49 61.74,31.01 R23.2 ; R25.2 64.22,24.77 64.73,24.77 v1(65.12,24.38) ; U2.1 72.86,24.5 72.61,24.75 v1(71.75,24.75)
  TOP w0.5: R24.1 49.95,23.84 50.22,23.57 59.71,23.57 61.5,25.36 C11.2 62.28,25.46 62.31,25.49 R25.2
  BOTTOM w0.25: v1(65.12,24.38) 65.52,23.98 70.98,23.98 v1(71.75,24.75)
IOUT: length 20.4
  TOP w0.127: Q5.3 19.77,8.1 ; Q5.3 19.77,6.54 ; Q5.3 21.05,7.32 ; Q5.3 18.49,7.32 ; Q13.3 22.02,25.1 ; Q13.3 20.74,24.32 ; Q13.3 22.02,23.54 ; Q13.3 23.3,24.32 ; R41.2 9.38,26.91 ; R41.2 7.12,26.91 ; R41.2 8.25,26.03 ; R41.2 8.25,27.79 ; Q10.3 22.02,16.6 ; Q10.3 23.3,15.82 ; Q10.3 20.74,15.82 ; Q10.3 22.02,15.04 ; 10.66,27.75 R38.2 11.24,27.17 ; R42.2 4.5,27.79 ; R42.2 4.5,26.03 ; R42.2 5.63,26.91
  vias: v1(4.38,25.5) v1(5.5,24.5) v1(6.5,25.5) v1(7.88,24.5) v1(8.75,25.5) v1(10.5,26.5) v1(18,8.75) v1(18,6) v1(19.75,8.75) v1(19.75,6) v1(20,25.75) v1(20,23) v1(20.25,17.25) v1(20.25,14.5) v1(21.5,8.75) v1(21.5,6) v1(22,25.75) v1(22,23) v1(22,17.25) v1(22,14.5) v1(23.75,17.25) v1(23.75,14.5) v1(24,25.75) v1(24,23)
IS: length 138.1
  TOP w0.25: U2.6 v1(69.68,21.75) ; U3.9 81.2,11.8 v1(80.38,12.62)
  TOP w0.35: U3.9 81.2,9.25 82.2,8.25 83.25,8.25 83.95,7.55 83.95,5.7 83,4.75 63.25,4.75 62.75,4.25 62.75,3 v1(61.5,1.75)
  TOP w0.5: C17.2 12.79,29.22 12.76,29.19 R38.1 v1(12.76,26.75) 9.26,23.25 6.5,23.25 v1(4.75,21.5)
  BOTTOM w0.25: v1(69.68,21.75) 71.75,21.75 79.86,13.64 79.86,13.14 v1(80.38,12.62)
  BOTTOM w0.5: v1(4.75,21.5) 4.75,10.12 9,5.88 9,2.25 10.5,0.75 60.5,0.75 v1(61.5,1.75)
MO: length 7.6
  TOP w0.25: U2.17 v1(70.95,16.05) ; R30.1 v1(70.75,11.5)
  BOTTOM w0.25: v1(70.75,11.5) 70.75,15.29 70.95,15.49 v1(70.95,16.05)
MP: length 20.4
  TOP w0.25: v1(69.75,8.25) 70.26,8.25 R30.2 ; v1(78,12.5) v1(74,12.5) ; U3.12 v1(83.11,12)
  BOTTOM w0.25: v1(78,12.5) 78.5,12 v1(83.11,12) ; J3.2 68.75,7.25 v1(69.75,8.25) v1(74,12.5)
MPC-RX: length 23.4
  TOP w0.25: U3.19 81.84,18.78 82,18.94 v1(82,19.5) ; Q12.4 88.25,32.75 v1(88.25,31.5) ; R44.1 v1(80,25)
  BOTTOM w0.25: v1(88.25,31.5) 81.75,25 v1(80,25) 80,24.25 80.75,23.5 80.75,20.75 v1(82,19.5)
MPC-TX: length 11.6
  TOP w0.25: v1(78,25) R51.2 ; v1(81,19.5) 81,18.94 81.2,18.74 U3.20
  BOTTOM w0.25: v1(81,19.5) 80,20.5 80,23 v1(78,25)
OCDSCL: length 17.1
  TOP w0.25: R52.1 85.75,14.75 85.25,15.25 85.25,18.38 83,20.62 79.75,20.62 76.76,17.63 U3.27
OCDSDA: length 16.3
  TOP w0.25: U3.28 76.12,17.62 79.5,21 83.25,21 85.75,18.5 85.75,17 86,16.75 R53.1
OSW1: length 13.3
  TOP w0.25: U3.17 83.11,17.2 v1(83.66,17.75)
  BOTTOM w0.25: v1(83.66,17.75) 84.05,18.14 84.05,18.41 90.89,25.25 J7.2
OSW2: length 15.1
  TOP w0.25: U3.18 82.47,17.47 v1(82.75,17.75)
  BOTTOM w0.25: J7.3 91.14,26.65 91.14,26.14 v1(82.75,17.75)
PIR1: length 20.3
  TOP w0.25: v1(80.25,17.75) 79.21,17.75 78.66,17.2 U3.24
  BOTTOM w0.25: J7.4 90.5,28.01 90.5,26.29 81.96,17.75 v1(80.25,17.75)
PIR2: length 22.7
  TOP w0.25: v1(80.25,18.75) 79.29,18.75 78.03,17.49 U3.25
  BOTTOM w0.25: J7.5 89.75,29.26 89.75,26.25 82.25,18.75 v1(80.25,18.75)
PRS1: length 23.9
  TOP w0.25: v1(68.56,4.06) 69.11,4.06 69.36,4.31 83.27,4.31 84.38,5.42 U3.14
  BOTTOM w0.25: J8.2 67.75,3.25 v1(68.56,4.06)
PRS2: length 32.8
  TOP w0.25: J8.3 65.75,2.94 66,3.19 83.69,3.19 85.25,4.75 85.25,4.97 85.26,4.97 85.26,13.92 84.38,14.8 U3.15
PWR-ON: length 5
  TOP w0.25: J6.4 91.76,48.52 90.02,50.26 R5.1
QD: length 35.1
  TOP w0.25: R39.2 R34.1 ; R34.1 67.5,24.73 67.78,24.45 U2.9 67.75,23.22 v1(67.75,21.75) ; R34.1 66.85,26.24 66.5,26.59 66.5,29.31 65.81,30 C15.2 ; U3.13 83.74,11.71 83.86,11.82 83.86,12.36 v1(84.25,12.75)
  BOTTOM w0.25: v1(67.75,21.75) 68.75,22.75 71.5,22.75 81.44,12.81 83.64,12.81 83.69,12.75 v1(84.25,12.75)
RST: length 21.3
  TOP w0.25: 86.74,18.99 87.5,19.75 88.75,19.75 90.25,18.25 C19.1 ; 86.74,18.99 R54.1 ; 86.74,18.99 86.74,19.08 v1(86.25,19.57) 86.74,20.06 R50.2 ; v1(84.5,17.75) 84.5,18.5 82.75,20.25 80,20.25 77.39,17.64 U3.26
  BOTTOM w0.25: v1(84.5,17.75) 84.89,18.14 84.89,18.52 85.56,19.18 85.86,19.18 v1(86.25,19.57)
SYS-RX: length 15.1
  TOP w0.25: Q14.4 79.95,42.33 80.89,43.27 81.18,43.27 82.01,44.1 R47.1 83,45.74 83,45.75 83.25,46 86,46 87.27,47.27 J6.3
SYS-TX: length 4.4
  TOP w0.25: R46.1 91.52,46.26 91.76,46.02 J6.2
U: length 41.1
  TOP w0.127: 34.24,7.32 Q2.3 ; Q2.3 35.52,6.54 ; Q2.3 36.8,7.32 ; Q2.3 35.52,8.1
  TOP w0.5: 41.67,2.58 41.67,3.08 v1(41,3.75) ; 41.67,2.58 C6.2 ; 41.67,2.58 42.5,3.41 R13.2 47.58,3.41 48,3.83 48,7.92 53.65,13.57 U1.18
  TOP w2.5: Q5.2 8,10.42 J2.1
  BOTTOM w0.5: v1(41,3.75) 37.25,3.75 36.25,4.75
  vias: v1(13,4) v1(13,2.75) v1(14.5,4) v1(14.5,2.75) v1(16,4) v1(16,2.75) v1(33.75,8.5) v1(33.75,7.5) v1(33.75,6.5) v1(37.5,8.5) v1(37.5,7.5) v1(37.5,6.5)
UH: length 19.5
  TOP w0.25: U2.10 v1(61,23.25) ; 63.85,12.3 U1.2 62.45,12.3 60.5,14.26 v1(60.5,21.75)
  BOTTOM w0.25: v1(61,23.25) 60.5,22.75 v1(60.5,21.75)
UHO: length 19
  TOP w0.5: U1.19 55.05,12.3 56.5,10.86 v1(56.5,9.5) ; v1(44.75,5) R1.1
  BOTTOM w0.5: v1(44.75,5) 46,5 50,9 56,9 v1(56.5,9.5)
UL: length 4.7
  TOP w0.25: U2.11 66.04,17.75 64.4,16.11 U1.5
ULO: length 21
  TOP w0.5: U1.11 53,22.46 v1(52.53,22) ; R10.1 44.5,8 46.07,9.57 v1(47.18,9.57)
  BOTTOM w0.5: v1(47.18,9.57) 51.75,14.15 51.75,15 52.53,15.79 v1(52.53,22)
UVB: length 16.9
  TOP w0.5: C6.1 44,2.25 44.5,1.75 47.5,1.75 50.5,4.75 D3.2 50.5,8.75 52.78,11.04 U1.20
V+: length 34.7
  TOP w0.127: Q8.3 39.05,15.82 ; Q8.3 37.77,15.04 ; Q8.3 36.49,15.82 ; Q8.3 37.77,16.6
  TOP w0.5: C10.2 43.92,10.9 ; 43.92,10.9 45.16,12.14 45.16,12.16 R18.2 49,12.16 50.5,13.66 50.5,16.5 51.38,17.39 U1.15 ; 43.92,10.9 43.92,11.79 v1(43.48,12.23)
  TOP w2.5: J2.2 11.92,17.25 Q10.2
  BOTTOM w0.5: 38.75,13 39.52,12.23 v1(43.48,12.23)
  vias: v1(15.25,12.5) v1(15.25,11.25) v1(16.75,12.5) v1(16.75,11.25) v1(18.25,12.5) v1(18.25,11.25) v1(36,16.75) v1(36,15.75) v1(36,14.75) v1(39.75,16.75) v1(39.75,15.75) v1(39.75,14.75)
VH: length 7.9
  TOP w0.25: U1.3 64.92,13.57 v1(65,13.5) ; U2.12 v1(67.78,16.53)
  BOTTOM w0.25: v1(65,13.5) 66,13.5 67.78,15.28 v1(67.78,16.53)
VHO: length 9.6
  TOP w0.5: v1(47.25,13.75) R20.1 ; U1.16 v1(51.5,16.11)
  BOTTOM w0.5: v1(51.5,16.11) 49.62,16.11 v1(47.25,13.75)
VL: length 7.3
  TOP w0.25: U1.6 64.4,17.39 66.27,19.25 68,19.25 68.41,18.84 U2.13
VLO: length 22.6
  TOP w0.5: v1(47.25,17) 46.75,16.5 R26.1 ; U1.10 v1(56.78,22.46)
  BOTTOM w0.5: v1(47.25,17) 47.5,17.25 50,17.25 51.5,18.75 51.5,22 53,23.5 55.07,23.5 56.1,22.46 v1(56.78,22.46)
VOD: length 50.5
  TOP w0.25: U2.3 71.59,21.78 70.81,21 v1(70.25,21) ; v1(79.12,12.62) 79.64,12.11 80.11,12.11 80.57,11.64 U3.8 ; R40.2 v1(52.49,28.25)
  TOP w0.5: R40.2 50.26,28 48.81,28 47.81,27 C16.2 46.09,27 R35.1
  BOTTOM w0.25: v1(52.49,28.25) 62,28.25 62.75,27.5 62.75,24.5 66.25,21 v1(70.25,21) 71.91,21 79.11,13.81 79.11,13.2 79.12,13.18 v1(79.12,12.62)
VR: length 23.9
  TOP w0.25: U2.2 72.22,21.31 73.5,20.03 73.5,16.92 73,16.42 D9.1 71.96,14.35 71.88,14.26 R28.1 v1(69.76,14.26) ; v1(69.25,11.5) 68.75,11 ; 68.75,11 68.25,11.5 65.5,11.5 64.04,10.04 C12.2 ; 68.75,11 R31.1
  BOTTOM w0.25: v1(69.76,14.26) 69.76,12.01 v1(69.25,11.5)
VRI: length 21
  TOP w0.25: J3.4 66.5,8 R37.2 R31.2 68.75,8.09 69.45,7.39 73.39,7.39 74,8 74,11.5 74.5,12 77.75,12 78.03,11.72 U3.4
VVB: length 17.7
  TOP w0.5: v1(52.75,14.5) 53.09,14.85 U1.17 ; C10.1 47.75,10.75 v1(48.75,9.75) ; D7.2 54.5,9 53.75,9.75 v1(52.75,9.75)
  BOTTOM w0.5: v1(48.75,9.75) v1(52.75,9.75) v1(52.75,14.5)
W: length 29.3
  TOP w0.127: 37.77,23.54 Q11.3 ; Q11.3 37.77,25.1 ; Q11.3 39.05,24.32 ; Q11.3 36.49,24.32
  TOP w0.5: C18.2 43.92,19.4 ; 43.92,19.4 45.18,20.66 R24.2 50.83,20.66 51.36,21.2 U1.12 ; 43.92,19.4 43.92,19.58 v1(43,20.5)
  TOP w2.5: Q13.2 14.97,21.43 14.55,21.43 14.33,21.21 J2.3
  BOTTOM w0.5: v1(43,20.5) 40,20.5 39,21.5
  vias: v1(15.25,21) v1(15.25,19.75) v1(16.75,21) v1(16.75,19.75) v1(18.25,21) v1(18.25,19.75) v1(36,25.25) v1(36,24.25) v1(36,23.25) v1(39.75,25.25) v1(39.75,24.25) v1(39.75,23.25)
WH: length 7.8
  TOP w0.25: U1.4 64.84,14.85 65.75,15.75 68.25,15.75 69.05,16.55 U2.14
WHO: length 11
  TOP w0.5: v1(50.5,19.75) 51.18,19.75 51.36,19.93 U1.13 ; R43.1 v1(50.25,22.25)
  BOTTOM w0.5: v1(50.5,19.75) 50.5,20.43 50.25,20.68 v1(50.25,22.25)
WL: length 8.6
  TOP w0.25: U1.7 64.91,18.66 66,19.75 69,19.75 69.68,19.07 U2.15
WLO: length 21.7
  TOP w0.5: v1(46.5,25.99) 45.76,25.25 R48.1 ; v1(61.72,21.25) 62.34,21.25 62.4,21.2 U1.9
  BOTTOM w0.5: v1(46.5,25.99) 60.01,25.99 61.72,24.28 v1(61.72,21.25)
WVB: length 22.4
  TOP w0.5: C18.1 47.5,19.25 48.07,18.68 52.95,18.68 52.97,18.66 U1.14 55.05,18.66 58.5,15.21 D11.2
XTAL1: length 6.7
  TOP w0.25: U3.1 75.65,10.5 74.43,9.28 74.43,7.38 C21.2 74.74,6.2 Y1.3
XTAL2: length 5.3
  TOP w0.25: C20.2 79.5,7.25 78.95,7.8 Y1.1 77.75,7.9 77.75,8.5 76.76,9.49 U3.2
ZF: length 15.4
  TOP w0.25: U2.16 70.32,16.48 68.75,14.91 R27.1 68.26,14.26 66.74,12.74 R36.2 65.49,12.74 v1(65,12.25)
  BOTTOM w0.25: v1(65,12.25) 65,8 J3.3
N4601745: length 75.4
  TOP w0.75: T1.1 37,37.54 39.46,40 R4.1
  TOP w1: C2.1 C3.1 50.38,33.05 v1(48.5,33.05)
  TOP w1.5: 27.11,45.68 C1.2 26.39,45.68 25.57,46.5 20.25,46.5 18.75,48 Q1.3
  BOTTOM w1: T1.1 38.46,33.71 47.84,33.71 v1(48.5,33.05)
  BOTTOM w1.5: Q1.3 14.3,45.05 RV1.1 16.38,42.17 16.38,40.62 18.75,38.25 18.75,36.25 20.25,34.75 34.5,34.75 T1.1
N4601755: length 24
  TOP w1.5: RV1.2 23.63,42.32 C1.1 26.37,41.95 26.37,39.16 29,36.53 T1.2 27.45,32.25 25.2,30 F1.1
N4602027: length 6
  TOP w1.5: D2.3 32,41.57 30.68,40.25 T1.3
N16738380: length 6.8
  TOP w0.5: R6.1 40.99,5 ; 40.99,5 R1.2 ; 40.99,5 40.99,7.68 40.57,8.1 D1.2
N16738503: length 26
  TOP w0.35: R10.2 41.99,8.78 41.27,9.5 v1(34.25,9.5)
  TOP w0.5: R14.1 25,4.76 25,7.92 24.57,8.35 23.8,8.35 ; v1(25.25,9.5) 24.5,9.5 23.8,8.8 23.8,8.35 ; 23.8,8.35 D5.2
  BOTTOM w0.35: v1(25.25,9.5) v1(34.25,9.5)
N16738511: length 8.2
  TOP w0.5: D5.1 23.75,5.26 22.7,4.21 22.7,2.77 ; R14.2 23.22,2.24 22.7,2.77 ; 22.7,2.77 Q5.1
N16741777: length 8.2
  TOP w0.5: 38.75,2.95 39.46,2.24 R6.2 ; 38.75,2.95 38.57,2.77 Q2.1 ; 38.75,2.95 38.5,3.2 38.5,4.7 39.7,5.9 D1.1
N16742623: length 6.8
  TOP w0.5: 43.25,13.75 R20.2 ; 43.25,13.75 43.25,13.51 R22.1 ; 43.25,13.75 43.25,16.17 42.82,16.6 D6.2
N16742635: length 8.2
  TOP w0.5: 41.18,11.27 41.71,10.74 R22.2 ; 41.18,11.27 40.88,11.57 40.88,13.28 41.29,13.7 41.29,13.74 41.95,14.4 D6.1 ; 41.18,11.27 Q8.1
N16742849: length 25.8
  TOP w0.35: R26.2 44.24,17.28 43.77,17.75 v1(34.75,17.75)
  TOP w0.5: v1(27.18,17.75) 26.5,17.75 26,17.25 D8.2 26.82,17.1 27.25,16.67 27.25,13.26 R29.1
  BOTTOM w0.35: v1(27.18,17.75) v1(34.75,17.75)
N16742861: length 8.5
  TOP w0.5: 24.95,11.27 24.95,13 24.99,13 26,14.01 D8.1 ; 24.95,11.27 25.47,10.74 R29.2 ; 24.95,11.27 Q10.1
N16743057: length 6.8
  TOP w0.5: R45.1 43.25,22.01 43.25,22.25 ; R43.2 43.25,22.25 ; 43.25,22.25 43.25,24.67 42.82,25.1 D10.2
N16743069: length 8
  TOP w0.5: 41.2,19.74 41.17,19.77 Q11.1 ; 41.2,19.74 41.2,22.11 41.29,22.2 41.29,22.24 41.95,22.9 D10.1 ; 41.2,19.74 41.7,19.24 R45.2
N16743283: length 25.8
  TOP w0.35: R48.2 44.24,25.74 43.73,26.25 v1(34.75,26.25)
  TOP w0.5: R49.1 27.24,21.75 27.24,25.18 26.82,25.6 D13.2 26,25.7 26.55,26.25 v1(27.25,26.25)
  BOTTOM w0.35: v1(27.25,26.25) v1(34.75,26.25)
N16743295: length 8.5
  TOP w0.5: 25,19.77 25,19.71 25.47,19.24 R49.2 ; 25,19.77 Q13.1 ; 25,19.77 25,21.51 26,22.51 D13.1
N16774211: length 3.1
  TOP w0.25: Q7.3 58.25,32.01 R16.1
N16774244: length 3.1
  TOP w0.25: Q6.3 54.25,32.01 R11.1
N16774481: length 3.3
  TOP w0.25: R21.1 62.25,32.51 Q9.3
N16819977: length 3.8
  TOP w1.5: T1.4 D2.1
N16878550: length 14.4
  TOP w0.25: v1(86.75,8.75) 88.29,10.29 C24.2 C25.2 ; v1(80.75,8) 80.19,8 79.3,8.89 U3.6
  BOTTOM w0.25: v1(86.75,8.75) 86,8 v1(80.75,8)
N16891021: length 5.1
  TOP w0.25: R52.2 88.84,14.17 89.2,14.17 90.75,12.62 90.75,12.03 91.01,11.77 J9.2
N16891035: length 6.2
  TOP w0.25: R53.2 89.25,16.75 89.5,16.5 89.5,14.5 91,13 91.74,13 J9.3
N16891049: length 6.5
  TOP w0.25: J9.4 91.01,14.27 90.25,15.03 90.25,17 89.08,18.17 88.84,18.17 R54.2
N16892886: length 5.9
  TOP w0.25: 79.25,29.75 79.4,29.9 D14.2 79.4,31.2 79.38,31.22 79.38,31.5 79.95,32.08 Q14.1 ; 79.25,29.75 78,28.5 R51.1 ; 79.25,29.75 79.25,29.75 79.3,29.8
N16893309: length 4.5
  TOP w0.25: D12.2 87.59,44.75 87.6,44.74 R46.2 88.25,44.09 88.3,44.04 Q12.1
N16971591: length 2
  TOP w0.25: R3.1 LED1.1
N16977302: length 8.5
  BOTTOM w2.5: J1.2 12.29,39.96 RT1.2
N16977308: length 10.9
  TOP w2.5: J1.1 9.86,34.18 12.92,34.18 15.45,31.65 F1.2
N16980594: length 5.6
  TOP w0.25: Q4.1 75.6,43.49 74.59,44.5 74.59,44.75 D4.2 R2.2
N16984452: length 26.3
  TOP w0.5: Q4.6 75.6,31.61 75.24,31.25 68.71,31.25 64.75,35.21 64.75,37.75 63.5,39 R7.1
N16984463: length 48.3
  TOP w0.5: 47.6,31.25 R9.1
  TOP w0.75: v1(46.75,37) R8.2
  TOP w1: R8.2 47.75,34.87 47,34.12 47,31.85 47.6,31.25 v1(46.6,30.25)
  BOTTOM w0.75: RT1.1 v1(46.75,37)
  BOTTOM w1.5: Q1.2 21.25,47.52 18.88,45.15 18.88,42.38 21.25,40 RT1.1
N16984545: length 16.9
  TOP w0.25: Q3.3 83.4,47.15 82.25,46 72.63,46 72.4,45.77 D4.1 72.4,43.95 73,43.35 Q4.2
N16986923: length 57.1
  TOP w0.5: v1(48.25,40.75) 63.75,40.75 65.75,38.75 65.75,35.25 68.25,32.75 Q4.4 ; R4.2 v1(39.25,42)
  BOTTOM w0.5: v1(48.25,40.75) 42.25,40.75 41,42 v1(39.25,42)
  BOTTOM w0.75: Q1.1 30.5,49.5 38,42 v1(39.25,42)
N16989663: length 3.2
  TOP w0.25: R5.2 87.06,48.74 85.62,47.3 Q3.1
N16989795: length 3
  TOP w0.75: C3.2 49.08,29.32 49.01,29.25 R9.2
N16991969: length 5.9
  TOP w1: R7.2 53.18,38.93 C2.2 48.68,38.93 R8.1
N16997004: length 10
  TOP w0.5: U4.4 38.13,59.91 38.53,59.5 D15.2 39.4,60.4 40,61 42.63,61 43.88,59.75 C30.2
N16997008: length 23.3
  TOP w0.5: v1(58,58) 58.88,58 60.35,56.53 D16.2 ; D15.1 41.6,59.45 43.3,57.75 46,57.75 47.5,56.25 ZD2.2 48.29,56.79 C31.1 49.75,57.5 v1(50.25,58)
  BOTTOM w0.5: v1(50.25,58) v1(58,58)
N16997012: length 33.2
  TOP w0.5: 52.5,59.8 51.38,58.68 51.38,56.95 49.75,55.31 C31.2 49.75,55.11 48.89,54.25 40.61,54.25 39.25,55.61 C29.1 38.12,55.71 37.74,56.09 U4.1 U4.2 ; 52.5,59.8 51.27,59.8 51.22,59.75 C30.1 ; 52.5,59.8 L1.1 58.27,59.8 58.57,59.5 D17.2
N16997119: length 2.9
  TOP w0.5: ZD2.1 43.47,56 43.21,55.74 R55.2
N16997188: length 5.7
  TOP w0.5: R55.1 40.97,57.26 40.95,57.29 C29.2 39.25,57.39 38,58.63 U4.3

## Copper pours and planes (outline as drawn; the poured copper is in the pictures)
GND on TOP: 43.25,1.25 42.75,1.75 42.75,25.5 47.25,30 47.25,53.75 35.25,53.75 32.88,56.12 32.88,60.25 32.38,60.75 31.25,60.75 30.75,60.25 30.75,55.75 39.25,47.25 39.25,46 36.75,46 31.5,51.25 15.25,51.25 14.99,51.51 14.99,59.16 22.38,61.1 30,61.75 94,61.75 95,60.75 95,55.5 93.5,54 86.25,54 83.75,51.5 68.5,51.5 67.5,50.5 67.5,36.5 68.75,35.25 92.5,35.25 93.25,34.5 93.25,13.75 80.75,1.25 ; 34 cut-outs
GND on BOTTOM: 38.75,0.25 38.75,1.04 38.75,1.05 38.75,8.75 41,11 41,25.75 42.75,25.75 44.38,27.38 14.38,27.38 12.5,29.25 2.88,29.25 2.88,31.75 12.38,31.75 13.38,30.75 46,30.75 47.25,32 47.25,40 46.75,40.5 42.25,40.5 31.5,51.25 15.25,51.25 14.99,51.51 14.99,59.14 22.38,61.09 30,61.75 94,61.75 95,60.75 95,55.5 93.5,54 86.25,54 83.75,51.5 68.5,51.5 67.5,50.5 67.5,36.5 68.75,35.25 93,35.25 94.5,33.75 94.5,1.25 93.5,0.25 ; 10 cut-outs
GND_SIGNAL on TOP, BOTTOM: 84.75,50 70,50 69,49 69,39.75 69.75,39 93.25,39 94.5,40.25 94.5,51.75 86.5,51.75
DC310V on TOP: 29.12,30.75 27.75,29.38 27.75,10.5 25.5,8.25 25.5,2 26,1.5 31.25,1.5 31.75,2 31.75,8.25 34,10.5 34,26.25 41.5,26.25 46.25,31 46.25,52.75 40.25,52.75 40.25,46.96 40.23,46.95 41.94,46.95 41.94,46.95 42.16,46.73 42.16,45 41.95,44.79 40.27,44.79 40.25,44.77 40.25,43.02 41.56,43.02 41.81,42.77 41.81,39.23 41.58,39 40.25,39 40.25,33.5 37.5,30.75 ; 1 cut-out
IOUT on TOP: 22.32,9.28 17.07,9.28 17.07,5.53 22.32,5.53
IOUT on TOP: 24.43,17.76 19.18,17.76 19.18,14.01 24.43,14.01
IOUT on TOP: 24.5,26.25 19.25,26.25 19.25,22.5 24.5,22.5
IOUT on TOP: 3.5,25 4.5,24 8.75,24 11.75,27 11.75,28.25 3.5,28.25
IOUT on BOTTOM: 10.25,24 10.25,5.5 22.25,5.5 22.25,9.25 13.75,9.25 13.75,14 24.5,14 24.5,17.75 13.75,17.75 13.75,22.5 24.5,22.5 24.5,26.25 12.5,26.25 10.5,28.25 2.88,28.25 2.88,25 3.88,24
U on TOP: 33.17,8.88 33.17,5.88 38.17,5.88 38.17,8.88
U on BOTTOM: 38.2,8.93 32.95,8.93 32.95,5.43 32.45,4.93 12.45,4.93 12.2,4.68 12.2,2.18 12.45,1.93 34.45,1.93 38.2,5.68
V+ on TOP: 35.5,17.25 35.5,14.25 40.5,14.25 40.5,17.25
V+ on BOTTOM: 40.5,17.25 35.25,17.25 35.25,13.75 34.75,13.25 14.75,13.25 14.5,13 14.5,10.5 14.75,10.25 36.75,10.25 40.5,14
W on TOP: 35.42,25.63 35.42,22.63 40.42,22.63 40.42,25.63
W on BOTTOM: 40.5,25.75 35.25,25.75 35.25,22.25 34.75,21.75 14.75,21.75 14.5,21.5 14.5,19 14.75,18.75 36.75,18.75 40.5,22.5

## Text on the board
Ref Des/Silkscreen Top: M249V10
XSECTION_CHART: *  SURFACE - AIR 0 MM | L1 TOP CONDUCTOR - COPPER 0.0305 MM | *  DIELECTRIC - FR-4 0.2032 MM | L2 BOTTOM CONDUCTOR - COPPER 0.0305 MM | DESIGN CROSS SECTION CHART | ___________________________ | TOTAL THICKNESS 0.2642 MM | 1-2 | 1
COMPVAL_TYPE_TOP: FIGURE | FINISHED_SIZE | 0.3 | 0.5 | 0.6 | 0.7 | 0.8 | 0.9 | 1.4 | 1.8 | 4.064 | DRILL CHART: TOP to BOTTOM | ALL UNITS ARE IN MILLIMETERS | PLATED | QTY | 376 | 3 | 12 | 20 | 10 | 5 | 4
